# Altium PCB Mring_alpha.PcbDoc
Units mil, origin at the board's own origin, x right, y up, seen from the top; angles counter-clockwise.
Board outline 969 x 345.19 mil, 2 copper layers (Top Layer, Bottom Layer), stack 11.8 mil thick; 25 components, 30 nets, 118 pads, 35 vias.
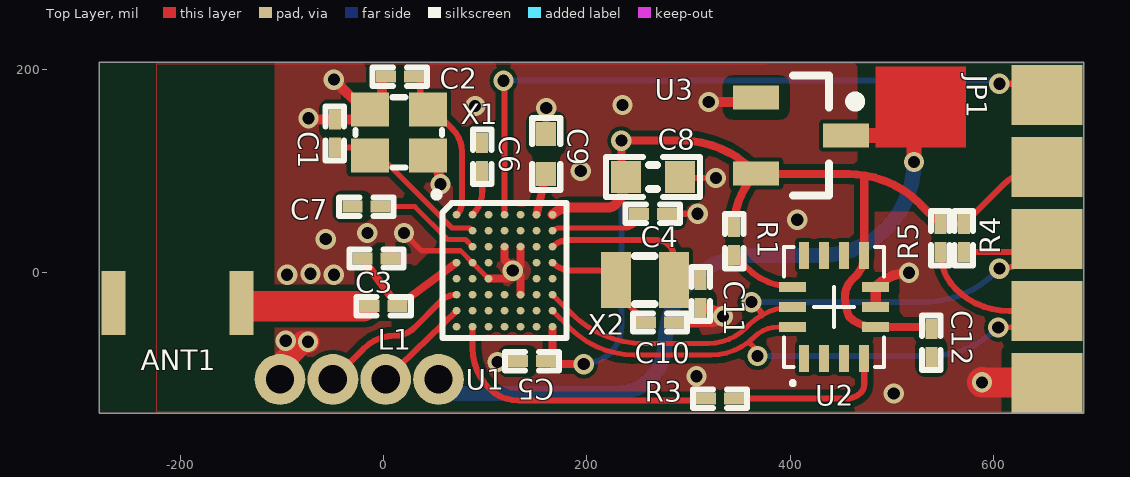
[diagram p0: Top Layer view]
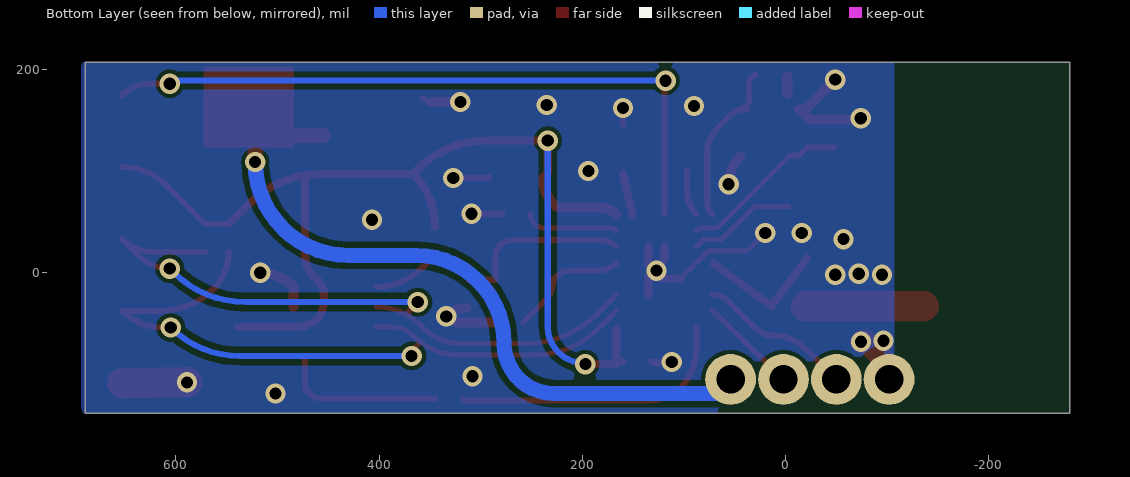
[diagram p1: Bottom Layer view, seen from below]
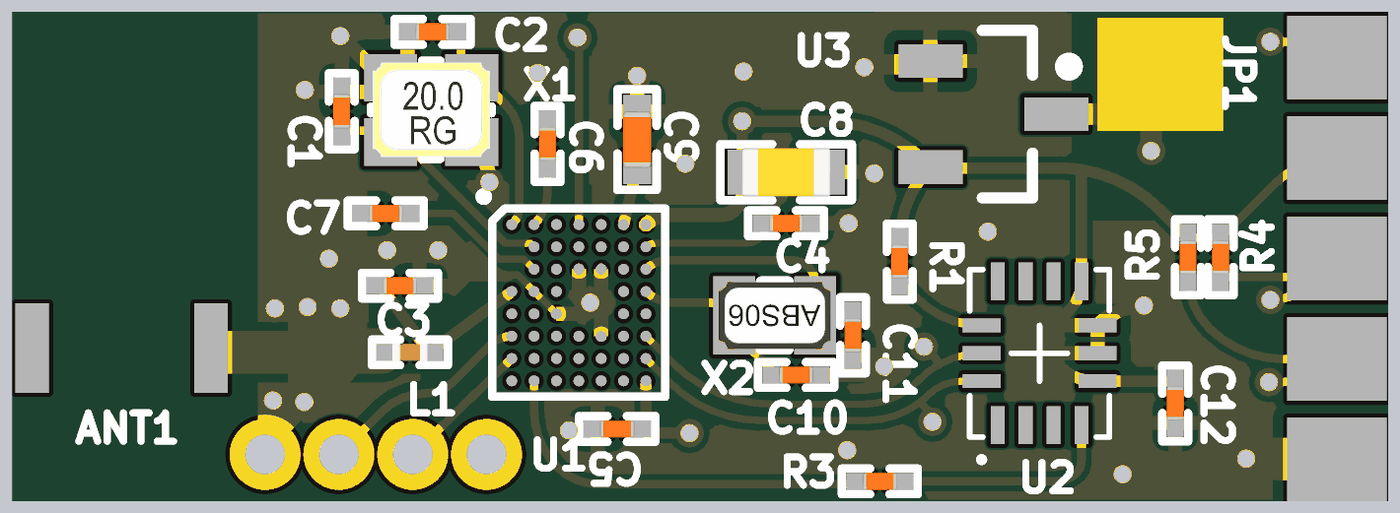
[diagram p2: 3D render of the assembled board from above, using the file's embedded part models]

## Layer stack, top to bottom
Top Solder: solder mask 0.4, Solder Resist, Dk 3.5
Top Layer: signal copper 1.4
Dielectric1: core 9, FR-4, Dk 4.8
Bottom Layer: signal copper 1.4
Bottom Solder: solder mask 0.4, Solder Resist, Dk 3.5

## Board outline
-280,-138.19 689,-138.19 689,207 -280,207

## Design rules (kind name [scope] priority, off if disabled: settings)
Clearance Polygon_ANT [(InNamedPolygon('Top_Layer-GND')) or (InNamedPolygon('Bottom_Layer-GND')) vs InNet('RF')] p1: gap=5 ignorepadtopadclearanceinfootprint=FALSE except(0: Arc-Hole Track-Hole SMDPad-Hole THPad-Hole Via-Hole Fill-Hole Poly-Hole Region-Hole Text-Hole)
Clearance Polygon [(InNamedPolygon('Top_Layer-GND')) or (InNamedPolygon('Bottom_Layer-GND')) or (InNamedPolygon('Mid_Layer_1-GND')) or (InNamedPolygon('Mid_Layer_2-GND'))] p2: gap=8 ignorepadtopadclearanceinfootprint=FALSE except(0: Arc-Hole Track-Hole SMDPad-Hole THPad-Hole Via-Hole Fill-Hole Poly-Hole Region-Hole Text-Hole)
Clearance [All] p3: gap=4 ignorepadtopadclearanceinfootprint=FALSE except(0: Arc-Hole Track-Hole SMDPad-Hole THPad-Hole Via-Hole Fill-Hole Poly-Hole Region-Hole Text-Hole; 6: Arc-Arc Arc-Track Arc-THPad Arc-Via Arc-Fill Arc-Poly Arc-Region Track-Track Track-THPad Track-Via Track-Fill Track-Poly Track-Region)
ComponentClearance [All] p1 off: gap=10 collisioncheckmode=3 verticalgap=10 showdistances=FALSE
FabricationTestPointUsage TestPointUsage [All] p1: valid=0 allowmultiple=FALSE
FabricationTestpoint Testpoint [All] p1: side=3 testpointundercomponent=TRUE minsize=40 maxsize=100 preferedsize=60 minholesize=0 maxholesize=40 preferedholesize=32 testpointgrid=1 allowsidetop=TRUE allowsidebottom=TRUE usegrid=TRUE gridtolerance=0.01
Height [All] p1 off: minheight=0 maxheight=1000 prefheight=500
HoleSize [All] p1: absolutevalues=TRUE maxlimit=160 minlimit=3 maxpercent=80.000 minpercent=20.000
HoleToHoleClearance [All] p1 off: gap=3 allowstackedmicrovias=FALSE
MinimumAnnularRing [All] p1 off: minimumring=3.94
PolygonConnect PolygonConnect_1 [isVia and innet(gnd)] p1: connectstyle=Direct reliefconductorwidth=10 reliefentries=4 polygonreliefangle="90 Angle" airgapwidth=10
PolygonConnect [All] p2: connectstyle=Relief reliefconductorwidth=10 reliefentries=4 polygonreliefangle="90 Angle" airgapwidth=10
RoutingVias [All] p1: holewidth=16 width=32 viastyle="Through Hole" minholewidth=3.94 minwidth=9.84 maxholewidth=28 maxwidth=50
SilkToSolderMaskClearance SilkscreenOverComponentPads [IsPad] p1: minsilkscreentomaskgap=10 clearancetoexposedcopper=TRUE
SolderMaskExpansion [All] p1: expansion=3
Width [All] p1: maxlimit=100 minlimit=5 preferedwidth=6 minimp=50.000000 maximp=50.000000 favimp=50.000000
23 further rules are at their usual default settings.

## Components (designator, comment, footprint, x,y, rotation, side; value= is the part's Value field where it differs from the comment)
ANT1 "AD3216" AN3216 -140,-30 r90 top
C1 "12pF" CAPC0603X03L -48,137 r270 top
C2 "12pF" CAPC0603X03L 16,193 r0 top
C3 "1.0pF" CAPC0603X03L -7,14 r180 top
C4 "100nF" CAPC0603X03L 265,58 r0 top
C5 "100nF" CAPC0603X03L 146,-87 r180 top
C6 "100pF" CAPC0603X03L 97,114 r270 top
C7 "100pF" CAPC0603X03L -17,65 r180 top
C8 "4.7µF" CAPC1608X06L 265,94 r0 top value=4.7μF
C9 "1.0µF" CAPC1005X04L 160,117 r270 top value=1.0μF
C10 "12pF" CAPC0603X03L 272,-49 r0 top
C11 "12pF" CAPC0603X03L 312,-21 r270 top
C12 "100nF" CAPC0603X03L 539,-69 r270 top
J2 "DEBUG_SWD_JUMPER" "DEBUG_SWD_JUMPER - duplicate" -24,-106 r180 top
JP1 "MAG_5P_JUMPER" MAG_5PIN 651.03,33.13 r270 top
L1 "3.3nH" INDC0603X03L 0,-33 r180 top
R1 "Res3" CAPC0603X03L 345,31 r90 top value=10K
R3 "Res3" CAPC0603X03L 331,-124 r0 top value=10K
R4 "Res3" CAPC0603X03L 571,34 r90 top value=10K
R5 "Res3" CAPC0603X03L 548,34 r90 top value=10K
U1 "nRF52832-CIAA" BGA50C40P7X8_295X322X50 119,2 r0 top locked
U2 "BMI160" BMI160-LGA14 443.47,-33.67 r90 top locked
U3 "XC6206" XC6206 411,131 r0 top
X1 "32MHz" BT-XTAL_2016 15,138 r0 top
X2 "32.768kHz" XTAL_2012 257,-7 r180 top

## Footprints (in the part's own frame and the unit in brackets; to place one, negate y for a bottom-side part, rotate by r counter-clockwise, add the part's x,y. Pads: shape width x height; smd on the part's side, far side on the other; paste and mask are expansions set on the pad)
AN3216 [mm]
  rect 1.6x0.6 smd: 1(0,0) ""(0,3.2)
BGA50C40P7X8_295X322X50 [mm] "BGA, 50-Leads, Body 2.95x3.22mmx0.50mm, Pitch 0.40mm"
  round 0.193 smd: A1(-1.2,1.4) A2(-0.8,1.4) A3(-0.4,1.4) A4(0,1.4) A5(0.4,1.4) A6(0.8,1.4) A7(1.2,1.4) B2(-0.8,1) B3(-0.4,1) B4(0,1) B5(0.4,1) B6(0.8,1) B7(1.2,1) C2(-0.8,0.6) C3(-0.4,0.6) C4(0,0.6) C5(0.4,0.6) C6(0.8,0.6) C7(1.2,0.6) D1(-1.2,0.2) D2(-0.8,0.2) D3(-0.4,0.2) D6(0.8,0.2) D7(1.2,0.2) E1(-1.2,-0.2) E2(-0.8,-0.2) E3(-0.4,-0.2) E6(0.8,-0.2) E7(1.2,-0.2) F1(-1.2,-0.6) F2(-0.8,-0.6) F3(-0.4,-0.6) F4(0,-0.6) F5(0.4,-0.6) F6(0.8,-0.6) F7(1.2,-0.6) G1(-1.2,-1) G2(-0.8,-1) G3(-0.4,-1) G4(0,-1) G5(0.4,-1) G6(0.8,-1) G7(1.2,-1) H1(-1.2,-1.4) H2(-0.8,-1.4) H3(-0.4,-1.4) H4(0,-1.4) H5(0.4,-1.4) H6(0.8,-1.4) H7(1.2,-1.4)
  silkscreen extent -1.75,-1.69 1.55,1.95, body extent -1.48,-1.61 1.48,1.61, height 0.51
BMI160-LGA14 [mm] "LCC, 14-Pins, Body 2.50x3.00mmx0.83mm, Pitch 0.50mm, IPC Medium Density"
  rect 0.675x0.25 smd: 1(-1.287,0.75) 2(-1.287,0.25) 3(-1.287,-0.25) 4(-1.287,-0.75) 8(1.287,-0.75) 9(1.287,-0.25) 10(1.287,0.25) 11(1.287,0.75)
  rect 0.25x0.675 smd: 5(-0.5,-1.037) 6(0,-1.037) 7(0.5,-1.037) 12(0.5,1.037) 13(0,1.037) 14(-0.5,1.037)
  silkscreen extent -1.95,-1.25 1.5,1.25, body extent -1.5,-1.25 1.5,1.25, height 0.97
BT-XTAL_2016 [mm] "Crystal 2.0 x 1.6 mm"
  rect 0.95x0.85 smd: 1(-0.725,-0.575) 2(0.725,-0.575) 3(0.725,0.575) 4(-0.725,0.575)
  silkscreen extent -1.08,-0.88 1.08,0.88, body extent -1.05,-0.85 1.05,0.85, height 0.56
CAPC0603X03L [mm] "Chip Capacitor, 2-Leads, Body 0.6x0.3mm, IPC High Density"
  rect 0.5x0.3 smd: 1(-0.35,0) 2(0.35,0)
  silkscreen extent -0.68,-0.23 0.68,0.23, body extent -0.3,-0.15 0.31,0.15, height 0.3
CAPC1005X04L [mm] "Chip Capacitor, 2-Leads, Body 1.0x0.5mm, IPC High Density"
  rect 0.6x0.5 smd: 1(-0.5,0) 2(0.5,0)
  silkscreen extent -0.9,-0.35 0.9,0.35, body extent -0.51,-0.25 0.51,0.25, height 0.5
CAPC1608X06L [mm] "Chip Capacitor, 2-Leads, Body 1.6x0.8mm, IPC High Density"
  rect 0.75x0.8 smd: 1(-0.675,0) 2(0.675,0)
  silkscreen extent -1.17,-0.5 1.17,0.5, body extent -0.8,-0.43 0.8,0.43, height 0.8
"DEBUG_SWD_JUMPER - duplicate" [mil]
  round 50 hole 27.99: 1(-78,-1) 2(-26,-1) 3(26,-1) 4(78,-1)
INDC0603X03L [mm] "Chip Inductor, 2-Leads, Body 0.6x0.3mm, IPC High Density"
  rect 0.5x0.3 smd: 1(-0.35,0) 2(0.35,0)
  silkscreen extent -0.68,-0.23 0.68,0.23, body extent -0.31,-0.16 0.31,0.16, height 0.26
MAG_5PIN [mm]
  rect 1.5x1.78 smd: 1(-3.6,0.05) 2(-1.8,0.05) 3(0,0.05) 4(1.8,0.05) 5(3.6,0.05)
XC6206 [mm]
  rect 1.15x0.6 smd: 1(-1.125,1.052) 2(-1.125,-0.848) 3(1.125,0.102)
  silkscreen extent -0.2,-1.4 1.48,1.6, body extent -0.7,-1.4 0.7,1.6, height 1.1
XTAL_2012 [mm]
  rect 0.75x1.4 smd: 1(-0.725,0) 2(0.725,0)
  silkscreen extent -0.24,-0.6 0.24,0.6, body extent -1,-0.61 1,0.61, height 0.6

## Part data
C1 C2 C10 C11: library part C0201-12p, "Capacitor, NP0, ±2%", Artikkelnr Noca=N.A., Artikkelnr Simpro=N.A., Footprint Doc=0201, LatestRevisionDate=2014-11-13, Note=50V, Part Number=C0201-12p, Pin Count=2, Published=2014-11-13, Publisher="Nordic Semiconductor"
C3: library part C0201-1.0p, "Capacitor, NP0, ±5%", Artikkelnr Noca=N.A., Artikkelnr Simpro=N.A., Footprint Doc=0201, LatestRevisionDate=2014-11-13, Note="Chip Cap 1%", Part Number=C0201-1.0p, Pin Count=2, Published=2014-11-13, Publisher="Nordic Semiconductor"
C4 C5 C12: library part C0201-100n, "Capacitor, X7R, ±10%", Artikkelnr Noca=N.A., Artikkelnr Simpro=N.A., Footprint Doc=0201, LatestRevisionDate=2014-11-13, Note=16V, Part Number=C0201-100n, Pin Count=2, Published=2014-11-13, Publisher="Nordic Semiconductor"
C6 C7: library part C0201-100p, "Capacitor, NP0, ±5%", Artikkelnr Noca=N.A., Artikkelnr Simpro=N.A., Footprint Doc=0201, LatestRevisionDate=2014-11-13, Note="Chip Cap 1%", Part Number=C0201-100p, Pin Count=2, Published=2014-11-13, Publisher="Nordic Semiconductor"
C8: library part C0603-4μ7, "Capacitor, X5R, ±10%", Artikkelnr Noca=20069060, Artikkelnr Simpro=N.A., Footprint Doc=0603, LatestRevisionDate=2009-11-23, Note=6.3V, Part Number=C0603-4μ7, Pin Count=2, Published=2009-05-08, Publisher="Nordic Semiconductor"
C9: library part C0402-1μ0, "Capacitor, X5R, ±5%", Artikkelnr Noca=20039235, Artikkelnr Simpro=N.A., Footprint Doc=0402, LatestRevisionDate=2009-11-23, Note=6.3V, Part Number=C0402-1μ0, Pin Count=2, Published=2009-05-08, Publisher="Nordic Semiconductor"
L1: library part L0201-3n3, "High frequency chip inductor ±5%", Artikkelnr Noca=N.A., Artikkelnr Simpro=N.A., Footprint Doc=0201, LatestRevisionDate=2013-04-10, Note="High frequency chip inductor ±5%", Part Number=L0201-3n3, Pin Count=2, Published=2013-04-10, Publisher="Nordic Semiconductor"
R1 R3 R4 R5: "Resistor", LatestRevisionDate=29-May-2009, LatestRevisionNote="IPC-7351 Footprint Added.", PackageDescription="Chip Resistor", PackageReference=J1-0603, Published=8-Jun-2000, Publisher="Altium Limited"
U1: "Multi-protocol Bluetooth Low Energy, ANT and 2.4GHz proprietary system-on-chip", Manufacturer="Nordic Semiconductor", Part number IPS=N.A., Artikkelnr Noca=N.A., Artikkelnr Simpro=N.A., Footprint Doc=WLCSP_C50, LatestRevisionDate=2016-03-11, Manufacturer Part Number=nRF52832-CIAA, Part Number=nRF52832-CIAA, Pin Count=54, Published=2016-03-11, Publisher="Nordic Semiconductor", Supplier="Nordic Semiconductor"
X1: library part XTAL_SMD2016_32MHz_8pF_Epson, "XTAL SMD 2016, 32MHz, Cl=8pF, Total Tol: ±40ppm", Manufacturer="Epson Toyocom", Manufacturer Part Number=Q22FA12800025, Supplier part number=171-2806, Artikkelnr Noca=N.A., Artikkelnr Simpro=N.A., Datasheet=http://www.epsondevice.com/docs/qd/en/DownloadServlet?id=ID000449, Footprint Doc=XTAL_2016, LatestRevisionDate=2014-11-27, Note="XTAL SMD 32.000MHz", Part Number=XTAL_SMD2016_32MHz_8pF_Epson, Pin Count=4, Published=2012-03-09, Publisher="Nordic Semiconductor", Supplier=Farnell
X2: "XTAL SMD 2012, 32.768kHz, Cl=9pF, Total Tol: ±50ppm", Manufacturer=Seiko, Manufacturer Part Number=SC20S-9.0PF20PPM, Part Number=XTAL_SMD2012_32.768kHz_9pF_Seiko, Artikkelnr Noca=N.A., Artikkelnr Simpro=N.A., Datasheet=http://www.sii.co.jp/en/quartz/files/2013/03/file_PRODUCT_MASTER_50811_GRAPHIC03.pdf, Footprint Doc=XTAL_2012, LatestRevisionDate=2015-10-15, Note="XTAL SMD 32.768kHz, 2012", Pin Count=2, Published=2015-10-15, Publisher="Nordic Semiconductor"

## Via types
v1: diameter 20, hole 12, Top Layer to Bottom Layer, tented both sides, 35 vias

## Nets (pads, with @x,y where several pads share a name; then routed paths per layer and width w, separated by ;. In a path a pad name is that pad's centre, name@x,y a point inside that pad or via, vN(x,y) a via of type N, cw(c..) or ccw(c..) an arc to the next point about the centre after c; other vN are vias at no path point)
DEC1: C4.1 U1.B7 | length 93.7
  Top Layer w5: U1.B7 cw(c172.59,35.02) 172.59,44 237.22,44 ccw(c237.22,58) C4.1
DEC2: C6.2 U1.A2 | length 45.6
  Top Layer w6: U1.A2 ccw(c64.58,80.04) 97,80.04 C6.2
DEC3: C7.1 U1.C2 | length 107
  Top Layer w5: C7.1 30.64,65 63,32.64 80.49,32.64 U1.C2
DEC4: C9.2 U1.A6 | length 41.3
  Top Layer w8: U1.A6 C9.2
GND: C1.1 C2.1 C3.1 C4.2 C5.2 C6.1 C7.2 C8.2 C9.1 C10.2 C11.2 C12.2 J2.4 JP1.5 U1.C4 U1.C5 U1.D2 U1.E3 U1.F5 U2.6 U2.7 U3.1 X1.2 X1.4 | length 764.2
  Top Layer w5: v1(20,39) 37.29,21.71 ; 38,21.62 75.76,21.62 U1.D2 U1.E3
  Top Layer w6: J2.4 J2.4@-102,-91 ; v1(-74,152) ccw(c-71.05,154.95) v1@-71.05,150.78 ; X1.2 X1.2@44.75,114.15 ; v1(112,-88) 123.22,-88 125.22,-90 127.22,-88 128.22,-89 129.22,-88 130.22,-89 C5.2 ; C9.1@160,145.68 159,146.68 160,147.68 v1(160,162) ; C4.2 v1(309,58) ; C8.2 ccw(c293.68,96.11) 293.68,93.13 v1(327,93.13) ; C11.2@312.19,-34.97 C11.2 C11.2@314.15,-34.78 ; U3.1@348,168 350,166 354,170 cw(c357.38,166.62) U3.1@357.38,171.4
  Top Layer w8: U1.E3 122,-5.87 v1@129.87,2 ; U1.C4 119,12.87 v1@129.87,2 ; U1.F5 134.75,-2.87 v1@129.87,2 ; U1.C5 134.75,6.87 v1@129.87,2
  Top Layer w10: v1@-71.05,150.78 C1.1 -23.4,150.78 X1.4 -19.64,160.64 v1(-49,190) ; X1.4@-1.78,176.4 C2.1@-1.78,193 ; X1.2@44.75,114.15 cw(c17.6,87) v1(56,87) ; C10.2 319.51,-49 ccw(c319.51,-28.51) v1(334,-43) ccw(c314.15,-62.85) C11.2@314.15,-34.78 ; v1(320,168) U3.1@348,168 ; U2.6 U2.7 485.05,-13.23 cw(c517,-45.19) v1(517,0)
  Top Layer w22: J2.4@-102,-91 -79,-68 v1(-74.38,-68)
  Top Layer w30: v1(589,-108) JP1.5
  other v1: 502,-119 308,-102 -96.38,-67 -95,-2 -49,-2 -72,-1 127,2 -57,33 -16,39 407,52.13 194,100 90,164 235,165
NetC3_2: C3.2 L1.1 U1.D1 | length 128.5
  Top Layer w8: C3.2 L1.1 U1.D1@70.2,8.73
NetR1_1: R1.1 U2.12 | length 67.8
  Top Layer w6: R1.1 357.51,4.71 ccw(c402.65,49.85) U2.12
NetR3_2: R3.2 U2.4 | length 161.1
  Top Layer w6: R3.2 455.29,-124 ccw(c455.29,-103.51) 469.78,-118 ccw(c462,-110.23) 473,-110.23 U2.4
P0.00/XL1: C10.1 U1.D7 X2.2 | length 120.3
  Top Layer w6: U1.D7 ccw(c185.25,28.88) 185.25,2 212,2 cw(c212,-16) 224.73,-3.27 X2.2 ccw(c258,-7) 237.11,-27.89 C10.1
P0.01/XL2: C11.1 U1.C7 X2.1 | length 179.6
  Top Layer w6: U1.C7 cw(c181.64,10.22) 181.64,32 268.93,32 cw(c268.93,14.93) 281,27 cw(c270.03,16.03) 285.54,16.03 X2.1 311.78,-7 C11.1
P0.05/AIN3: U1.E7
P0.06: JP1.3 R4.1 U1.F7 U2.13 | length 674.7
  Top Layer w5: U1.F7 184.9,-40.28 ccw(c255.62,30.43) 255.62,-69.57 319.41,-69.57 ccw(c319.41,-16.41) 357,-54 359.43,-51.57 cw(c402.65,-94.78) 371.96,-41.93 cw(c402.65,-94.78) U2.13
  Top Layer w6: v1(362,-29) 369.86,-36.86 cw(c364.79,-41.93) 371.96,-41.93 ; R4.1 621.82,20.22 ccw(c621.82,64.31) JP1.3 636.5,16.63 cw(c606,47.13) v1(606,4)
  Bottom Layer w6: v1(362,-29) 531.58,-29 ccw(c531.58,71) 602.29,0.29 v1(606,4)
P0.08: JP1.4 R5.1 U1.G7 U2.14 | length 707.8
  Top Layer w5: U1.G7 183.62,-54.75 ccw(c247,8.63) 247,-81 322,-81 ccw(c322,-20.64) 359.18,-68.19 ; v1@364.47,-73.49 359.18,-68.19 ; U2.14 388.74,-53.35 ccw(c388.74,-87.39) 364.68,-63.32 cw(c322,-20.64) 359.18,-68.19
  Top Layer w6: v1@364.47,-73.49 cw(c355.96,-82) v1(368,-82) ; R5.1 ccw(c599.23,20.22) 563.01,-16.01 ccw(c615.46,36.45) 615.46,-37.73 JP1.4 cw(c613.73,1.54) 613.73,-54 v1(605,-54)
  Bottom Layer w6: v1(368,-82) 537.4,-82 ccw(c537.4,13.6) v1(605,-54)
P0.12: U1.H6
P0.14: U1.H5
P0.15: U1.H4
P0.16: U1.H3
P0.18: R3.1 U1.H2 | length 282.3
  Top Layer w6: U1.H2 87.5,-74.17 ccw(c143.83,-74.17) 104,-114 ccw(c132.97,-85.03) 132.97,-126 312.39,-126 ccw(c312.39,-119.17) R3.1
P0.21: U1.H1
P0.24: U1.E1
P0.28/AIN4: U1.A3
P0.29/AIN5: JP1.1 U1.A4 | length 668.7
  Top Layer w6: U1.A4 v1@119,187 ; v1(606,186) 626.12,186 cw(c626.12,147.99) JP1.1
  Bottom Layer w6: v1(118,189) 598.76,189 cw(c598.76,178.76) v1(606,186)
P0.30/AIN6: U1.A5
RF: ANT1.1 L1.2 | length 116
  Top Layer w30: ANT1.1@-136,-33 L1.2@-20,-33
SWDCLK: J2.3 U1.F1 | length 152.3
  Top Layer w6: J2.3 -19.77,-74.77 cw(c11.06,-105.6) 11.06,-62 ccw(c11.06,-34.69) 30.37,-54.01 ; 30.38,-54 56.39,-27.99 cw(c71.76,-43.36) U1.F1
SWDIO: J2.2 U1.G1 | length 97.2
  Top Layer w6: J2.2 U1.G1
VCC: J2.1 U3.3 | length 708.4
  Top Layer w6: 521,144 cw(c521,143) 522,143 522,135
  Top Layer w15: U3.3 522,135 v1(522,109)
  Bottom Layer w6: J2.1 ccw(c68,-105) J2.1@68,-119
  Bottom Layer w15: J2.1@68,-119 227.57,-119 ccw(c227.57,-69.57) 277,-69.57 cw(c363.57,-69.57) 363.57,17 430,17 ccw(c430,109) v1(522,109)
VDD_NRF: C5.1 C8.1 C12.1 JP1.2 R1.2 R4.2 R5.2 U1.A7 U1.H7 U2.5 U2.8 U3.2 | length 1195.2
  Top Layer w6: C5.1@159.78,-89 C5.1 C5.1@166.24,-87 ; C8.1@238.43,92.17 C8.1 ; R1.2 R1.2@345,45.19 ; U3.2@363.6,100.71 U3.2 ccw(c368.15,99.04) U3.2@368.15,97 ; 473,95.45 473.28,95.72 ; C12.1@538.65,-53.35 C12.1@539,-53 ; R5.2 R4.2 608.99,85.77 cw(c653,41.76) JP1.2
  Top Layer w8: C5.1@166.24,-87 U1.H7@166.24,-56 ; C5.1@166.78,-90 v1(197,-90) ; C8.1 234,98.43 v1(234,130) 292.89,130 cw(c292.89,30) U3.2@363.6,100.71 ; R1.2@345,45.19 cw(c419.12,45.19) U3.2 ; U3.2@368.15,97 457.36,97 cw(c457.36,-3) 473.28,95.72 cw(c457.36,-3) 528.07,67.71 R5.2 ; 473,95.45 U2.8 cw(c444.03,17) 464.51,-3.49 461,-7 ccw(c477.9,-23.9) 454,-23.9 ccw(c500.11,-23.9) 458.32,-43.38 ccw(c482.39,-19.32) 482.39,-53.35 U2.5 C12.1@538.65,-53.35
  Top Layer w10: U1.A7 cw(c182.86,40.5) 182.86,64 220.76,64 ccw(c220.76,74.24) 228,67 ccw(c202.83,92.17) C8.1@238.43,92.17
  Bottom Layer w6: v1(197,-90) 198,-89 ccw(c198,-53) 234,-53 v1(234,130)
XC1: C1.2 U1.B2 X1.1 | length 169.4
  Top Layer w5: X1.1@-5.36,115.36 -4.17,115.36 67.19,44 84.87,44 U1.B2
  Top Layer w6: C1.2 -21.4,123.22 X1.1 X1.1@-5.36,115.36
XC2: C2.2 U1.A1 X1.3 | length 165.5
  Top Layer w6: C2.2@29.78,195 36,188.78 36,167 X1.3@42.36,160.64 ; X1.3@37.64,160.64 X1.3@42.36,160.64 ; U1.A1@71.76,57.24 U1.A1 72.82,58.18 ccw(c62.72,68.28) 77,68.28 77,119.27 ccw(c46.27,119.27) 68,141 51.77,157.23 ccw(c43.54,149) X1.3 X1.3@42.36,160.64
pads on no net: ANT1. U1.B3 U1.B4 U1.B5 U1.B6 U1.C3 U1.C6 U1.D3 U1.D6 U1.E2 U1.E6 U1.F2 U1.F3 U1.F4 U1.F6 U1.G2 U1.G3 U1.G4 U1.G5 U1.G6 U2.1 U2.2 U2.3 U2.9 U2.10 U2.11

## Polygon pours and split planes (outlines as drawn)
GND on Top Layer "AutoNaming" (solid, remove dead copper, pour order 12): -223,206 ccw(c-218.18,201.17) -225,201.17 -225,-137 691,-137 cw(c695.83,-132.17) 689,-132.17 689,207
GND on Top Layer "Top Layer-GND" (solid, remove dead copper, shelved, pour order 0): -224,-137 688,-137 ccw(c688,-136) 689,-136 689,206 378,206 cw(c378,207) 377,207 cw(c375,207) 375,205 -224,205
GND on Bottom Layer "AutoNaming" (solid, remove dead copper, pour order 8): -225,207 -225,-138.19 691.04,-138.19 cw(c691.04,-140.96) 693,-139 693,202.17 ccw(c686.17,202.17) 691,207

## Other copper
Top Layer:
  rectangle net VCC: 484,123 573,203
  pour cut-out: 625,207 466,207 466,60 625,60
  pour cut-out: 89.75,26 51,26 29,4 1,4 1,26 -29,26 -29,-48 89.75,-48
  pour cut-out: -107,207 -280,207 -280,-138.19 -107,-138.19
Bottom Layer:
  pour cut-out: -107,207.59 -280,207.59 -280,-137.59 -107,-137.59

## Silkscreen, mask and mechanical layers (free items; w line width, h text height)
Top Solder:
  rectangle: 484,123 573,203
Mechanical 1:
  lines w6: -279,-138.19 -279,207 691,207 691,-138.19 -279,-138.19

## Dimensions
-279,-138.19 to 691,-138.19 on Mechanical 3
691,207 to 691,-138.19 on Mechanical 3